# Altium PCB PPS_Buffer.PcbDoc
Units mil, origin at the board's own origin, x right, y up, seen from the top; angles counter-clockwise.
Board outline 655.03 x 750.03 mil, 2 copper layers (Top Layer, Bottom Layer); 24 components, 16 nets, 64 pads, 0 vias.
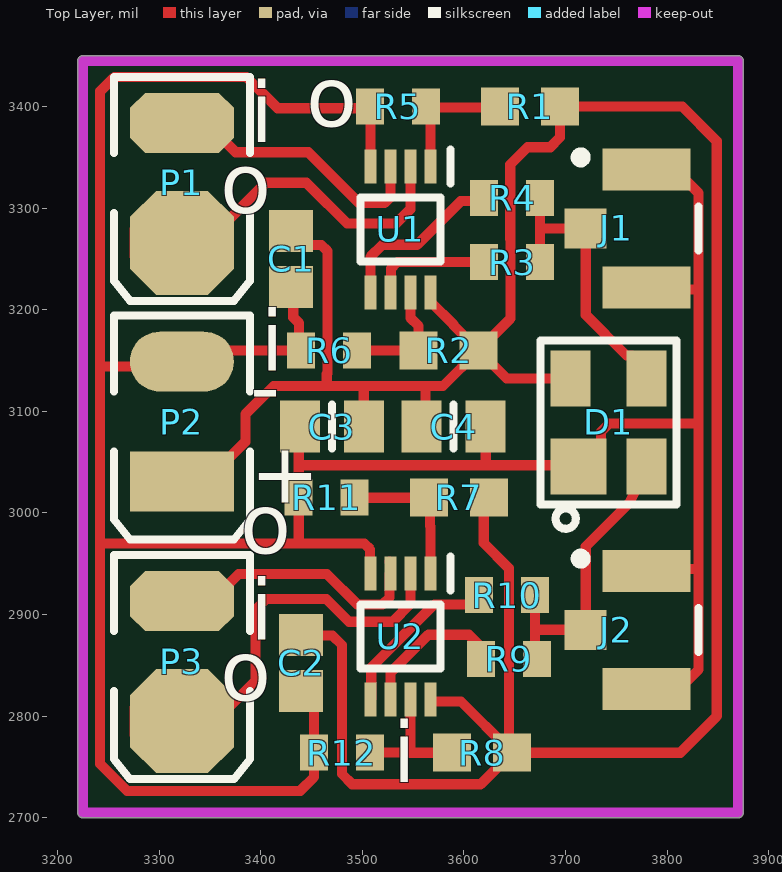
[diagram p0: Top Layer view]
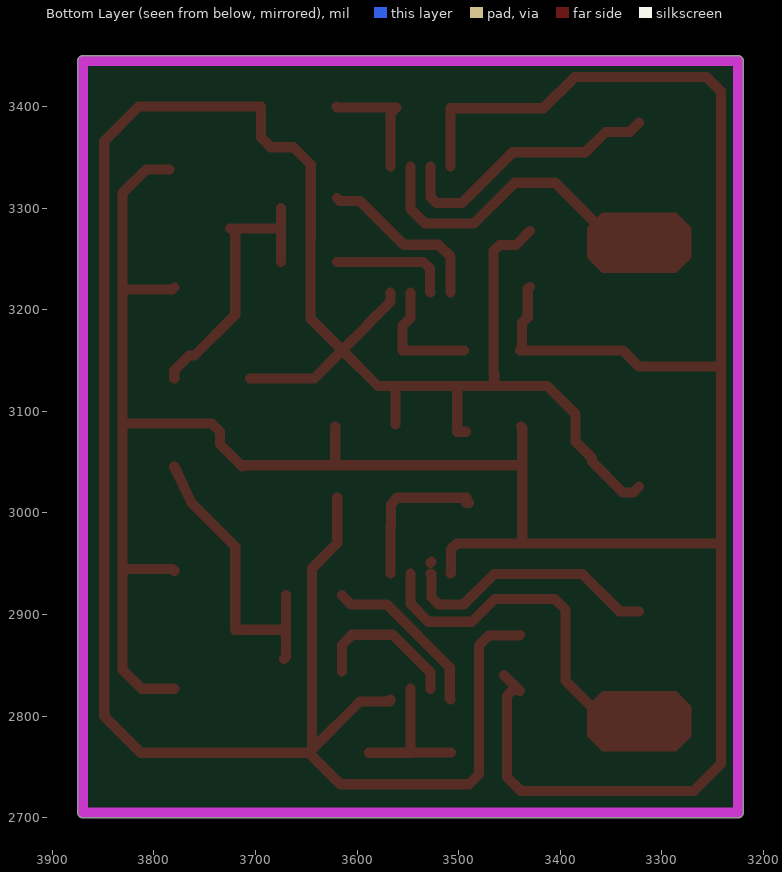
[diagram p1: Bottom Layer view, seen from below]

## Layer stack, top to bottom
Top Solder: solder mask 0.4, Solder Resist, Dk 3.5
Top Layer: signal copper 1.4
Dielectric 1: dielectric 12.6, FR-4, Dk 4.8
Bottom Layer: signal copper 1.4
Bottom Solder: solder mask 0.4, Solder Resist, Dk 3.5

## Board outline
3219.99,2705 ccw(c3225,2705) 3225,2699.99 3870,2699.99 ccw(c3870,2705) 3875.01,2705 3875.01,3445 ccw(c3870,3445) 3870,3450.01 3225,3450.01 ccw(c3225,3445) 3219.99,3445

## Design rules (kind name [scope] priority, off if disabled: settings)
Clearance [All] p1: gap=7 ignorepadtopadclearanceinfootprint=FALSE
PolygonConnect [All] p1: connectstyle=Relief reliefconductorwidth=10 reliefentries=4 polygonreliefangle="90 Angle" airgapwidth=10
RoomDefinition PPS_BUFFER [InComponentClass('PPS_BUFFER')] p1: confinementstyle=ConfineIn formatcopy=TRUE lockcomponents=FALSE outline 3225,2705 3870,2705 3870,3445 3225,3445
RoutingVias [All] p1: holewidth=28 width=50 viastyle="Through Hole" minholewidth=28 minwidth=50 maxholewidth=28 maxwidth=50
SolderMaskExpansion [All] p1: expansion=4 istentingtop=FALSE
Width [All] p1: maxlimit=10 minlimit=10 preferedwidth=10
30 further rules are at their usual default settings.

## Components (designator, comment, footprint, x,y, rotation, side; value= is the part's Value field where it differs from the comment)
C1 "0.1uF" CAPC1608X87X45ML20T05 3430,3250 r270 top
C2 "0.1uF" CAPC1608X87X45ML20T05 3439.92,2852.44 r270 top
C3 "Cap" 6-0805_L 3470,3085 r180 top value=1uF
C4 "Cap" 6-0805_L 3590,3085 r0 top value=10nF
D1 "8240136" SOT143-4L 3742.56,3089.06 r90 top
J1 "1909763-1" TECO-1909763-1_V 3780,3280 r270 top
J2 "1909763-1" TECO-1909763-1_V 3780,2885 r270 top
P1 "Header 2" 3.5X2.8X1.9#1 3322.56,3325 r270 top
P2 "Header 2" 3.5X2.8X1.9#2 3322.56,3090 r270 top
P3 "Header 2" 3.5X2.8X1.9#1 3322.56,2854.05 r270 top
R1 "4.7K" RESC1608X55X30NL15T15 3665,3400 r0 top
R2 "4.7K" RESC1608X55X30NL15T15 3585,3160 r0 top
R3 "49.9R" RESC1608X55X25NL10T15 3647.56,3247 r0 top
R4 "49.9R" RESC1608X55X25NL10T15 3647.44,3310 r0 top
R5 "1k" RESC1608X55X25NL10T15 3535,3400 r0 top
R6 "1k" RESC1608X55X25NL10T15 3467.44,3160 r0 top
R7 "4.7K" RESC1608X55X30NL15T15 3595,3015 r0 top
R8 "4.7K" RESC1608X55X30NL15T15 3618.03,2764.06 r0 top
R9 "49.9R" RESC1608X55X25NL10T15 3644.34,2856.47 r0 top
R10 "49.9R" RESC1608X55X25NL10T15 3642.56,2919.06 r0 top
R11 "1k" RESC1608X55X25NL10T15 3465,3015 r0 top
R12 "1k" RESC1608X55X25NL10T15 3480,2764.06 r0 top
U1 "NC7WV125K8X" SOP50P310X90-8N 3537.56,3279.06 r270 top
U2 "NC7WV125K8X" SOP50P310X90-8N 3537.56,2878.52 r270 top

## Footprints (in the part's own frame and the unit in brackets; to place one, negate y for a bottom-side part, rotate by r counter-clockwise, add the part's x,y. Pads: shape width x height; smd on the part's side, far side on the other; paste and mask are expansions set on the pad)
3.5X2.8X1.9#1 [mm] "SM LED; 2 C-Bend Leads; Body 3.5 x 2.8 x 1.9 mm, inc leads (LxWxH typ)"
  oct 1.5x2.6 smd: 1(-1.5,0)
  oct 2.6x2.6 smd: 2(1.5,0)
  Top Layer region: 1.875,-1.3 2.25,-0.925 2.25,0.925 1.875,1.3 1.125,1.3 0.75,0.925 0.75,-0.925 1.125,-1.3
  silkscreen extent -2.65,-1.7 2.95,1.7
3.5X2.8X1.9#2 [mm] "SM LED; 2 C-Bend Leads; Body 3.5 x 2.8 x 1.9 mm, inc leads (LxWxH typ)"
  oval 1.5x2.6 smd: 1(-1.5,0)
  rect 1.5x2.6 smd: 2(1.5,0)
  silkscreen extent -2.65,-1.7 2.95,1.7
6-0805_L [mm] "Chip Resistor, Body 2.0x1.2mm, IPC High Density"
  rect 1x1.3 smd: 1(-0.8,0) 2(0.8,0)
  silkscreen extent 0,-0.55 0,0.55, body extent -1.07,-0.7 1.07,0.7, height 0.7
CAPC1608X87X45ML20T05 [mm] "Chip Capacitor, 2-Leads, Body 1.60x0.80mm, IPC Low Density"
  rect 1.05x1.1 smd: 1(-0.7,0) 2(0.7,0)
  body extent -0.9,-0.5 0.9,0.5, height 0.87
RESC1608X55X25NL10T15 [mm] "Chip Resistor, 2-Leads, Body 1.70x0.90mm, IPC Medium Density"
  rect 0.7x0.9 smd: 1(-0.7,0) 2(0.7,0)
  body extent -0.85,-0.45 0.85,0.45, height 0.55
RESC1608X55X30NL15T15 [mm] "Chip Resistor, 2-Leads, Body 1.75x0.95mm, IPC Medium Density"
  rect 0.95x0.95 smd: 1(-0.75,0) 2(0.75,0)
  body extent -0.87,-0.48 0.87,0.48, height 0.55
SOP50P310X90-8N [mm]
  rect 0.85x0.3 smd: 1(-1.575,0.75) 2(-1.575,0.25) 3(-1.575,-0.25) 4(-1.575,-0.75) 5(1.575,-0.75) 6(1.575,-0.25) 7(1.575,0.25) 8(1.575,0.75)
  silkscreen extent -2,-1 0.8,1.25, body extent -1.55,-1 1.55,1, height 0.9
SOT143-4L [mm] "SOT143-4L, 4-Leads, Body 2.95x2.4mm, Pitch 1.70/1.90mm"
  rect 1.4x1.4 smd: 1(-1.1,0.75)
  rect 1.4x1 smd: 2(-1.1,-0.95) 3(1.1,-0.95) 4(1.1,0.95)
  silkscreen extent -2.66,-1.7 2.05,1.7, body extent -1.2,-1.46 1.2,1.46, height 1.03
TECO-1909763-1_V [mm] "SMD, 3-Leads, Body 2.6x2.6mm, Height 1.25mm"
  rect 1.05x2.2 smd: 1(-1.475,0) 3(1.475,0)
  rect 1x1.05 smd: 2(0,-1.525)
  silkscreen extent -1.9,-1.77 0.55,1.3, body extent -1.5,-1.55 1.5,1.55, height 1.23

## Part data
C1 C2: library part CMP-2006-00003-1, "C0603X104K5RACAUTO", Manufacturer=Kemet, Part Number=C0603X104K5RACAUTO
C3 C4: "Capacitor", LatestRevisionDate=17-Jul-2002, LatestRevisionNote="Re-released for DXP Platform.", PackageDescription="Radial Cap, Thru-Hole; 2 Leads; 0.3 in Pin Spacing", PackageReference=RAD-0.3, Published=8-Jun-2000, Publisher="Altium Limited"
D1: library part CMP-1486-00002-1, "TVS Diode WE-TVS-HS, VRWM=3.3V", Manufacturer="Wuerth Elektronik", Reverse Stand Off Voltage=3.3V, ComponentLink1Description="Manufacturer URL", ComponentLink1URL=http://www.we-online.com, ComponentLink2Description=Datasheet, ComponentLink2URL=http://katalog.we-online.de/kataloge/eisos/media/pdf/8240136.pdf, PackageReference=SOT143-4L, PartNumber=8240136
J1 J2: library part CMP-2000-07505-1, "Ultra Miniature Coaxial Connector Jack, 60 V, 50 Ohm, -40 to 90 degC, RoHS, Tape and Reel", Case\/Package=SMD/SMT, Dielectric Material=Polymer, Housing Colour=Beige, Manufacturer="TE Connectivity", Max Frequency=6GHz, Max Operating Temperature=90degC, Min Operating Temperature=-40degC, Package Description="3-Pin Surface Mount Device, Body 2.6 x 2.6 mm", Package Quantity=1, Package Reference=TECO-1909763-1, Body Material=LiquidCrystalPolymer, Body Plating=Gold, Connector Type=Jack, Contact Material=CopperAlloy, Contact Plating=Gold, Datasheet URL=http://www.te.com/commerce/DocumentDelivery/DDEController?Action=srchrtrv&DocNm=1909763&DocType=Customer+Drawing&DocLang=English, Datasheet Version="Rev. B2, 11/2015", ELV=Compliant, Fastening Type=Pull, Gender=Female, Impedance=50Ohm, Insulation Material=Thermoplastic, Lead Free=LeadFree, Length=3mm, Manufacturer URL=http://www.te.com/, Mount=SurfaceMount, Mounting Technology=SurfaceMount, Orientation=Straight, Packaging=TapeandReel, PCB Mounting Orientation=Vertical, Radiation Hardening=No, RoHSCompliant=true, Termination=SMD/SMT
P1 P2 P3: "Header, 2-Pin", LatestRevisionDate=17-Jul-2002, LatestRevisionNote="Re-released for DXP Platform.", Publisher="Altium Limited"
R1 R2 R7 R8: library part CMP-1012-00586-3, "Precision Thick Film Chip Resistor, 4.7 KOhm, +/- 1%, -55 to 155 degC, 0603 (1608 Metric), RoHS, Tape and Reel ERJ-3EKF4701V", Case Code (Imperial)=1206, Case Code (Metric)=3216, Case\Package=1205, Max Operating Temperature="125 degC", Min Operating Temperature="-55 degC", Package Quantity=1, Power Rating="250 mW", Resistance="220 Ohm", Tolerance=5%, Type (Resistor)="Thick Film", Voltage Rating="50 V", ComponentLink1Description="Manufacturer URL", ComponentLink1URL=http://www.panasonic.com/, ComponentLink2Description=Datasheet, ComponentLink2URL=http://industrial.panasonic.com/cdbs/www-data/pdf/RDA0000/AOA0000C86.pdf, DatasheetVersion=Apr-15, Elements=4, Height="0.024 inch", Length="0.126 inch", Mount="Surface Mount", PackageDescription="2-Pin Surface Mount Device, Body 1.6 x 0.85 mm", PackageReference=0603, Packaging="Tape and Reel", Pins=8, Radiation Hardening=No, REACH SVHC="No SVHC", RoHSCompliant=true, Width="0.063 inch"
R3 R4 R5 R6 R9 R10 R11 R12: library part CMP-1659-00036-1, "General Purpose Chip Resistor, 49.9 Ohm, +/- 1%, -55 to 155 degC, 0603 (1608 Metric), RoHS, Tape and Reel", Case\Package=LQFP, Max Operating Temperature="85 degC", Max Supply Voltage="3.63 V", Min Operating Temperature="-40 degC", Min Supply Voltage="2.97 V", Package Quantity=250, ComponentLink1Description="Manufacturer URL", ComponentLink1URL=http://www.yageo.com/, ComponentLink2Description=Datasheet, ComponentLink2URL=https://datasheet.ciiva.com/11808/0900766b80f96399-11808223.pdf, DatasheetVersion="Rev. 4, 04/2009", Interface=SPI, PackageDescription="2-Pin Surface Mount Device, Body 1.6 x 0.8 mm", PackageReference=0603, Packaging=Tray, Pins=48, RoHSCompliant=true
U1 U2: "Integrated Circuit", Manufacturer_Name="ON Semiconductor", Mouser Part Number=512-NC7WV125K8X, Arrow Part Number=NC7WV125K8X, Arrow Price/Stock=https://www.arrow.com/en/products/nc7wv125k8x/on-semiconductor, Datasheet Link=https://www.mouser.com/datasheet/2/308/NC7WV125-1301459.pdf, Height=0.9mm, Manufacturer_Part_Number=NC7WV125K8X, Mouser Price/Stock=https://www.mouser.com/Search/Refine.aspx?Keyword=512-NC7WV125K8X
  U1: Supplier 1=Newark

## Nets (pads, with @x,y where several pads share a name; then routed paths per layer and width w, separated by ;. In a path a pad name is that pad's centre, name@x,y a point inside that pad or via, vN(x,y) a via of type N, cw(c..) or ccw(c..) an arc to the next point about the centre after c; other vN are vias at no path point)
+3.3V: C1.1 C2.1 C3.1 C4.1 D1.4 P2.2 R1.2 R2.2 R7.2 R8.2 U1.8 U2.8 | length 2766.7
  Top Layer w10: P2.2@3322.56,3025.94 3328.5,3020 3338.27,3020 3368.74,3050.47 3368.74,3053.74 3385,3070 3385,3097.25 3412.75,3125 3465,3125 ; C1.1 3443.73,3263.83 3459.8,3263.83 3465.66,3257.97 3465.66,3137.31 3465,3136.65 3465,3125 ; C2.1 3440.64,2879.28 3470.72,2879.28 3480,2870 3480,2743 3490,2733 3616.5,2733 R8.2 ; C3.1@3492.99,3080 C3.1@3501.5,3080 ; C3.1 3501.5,3123.5 3500,3125 ; C4.1@3562.34,3087.34 3562.34,3125 ; U2.8 3567.99,2815.61 3567.99,2814.48 3597.14,2814.48 R8.2@3644.34,2767.28 ; U1.8 3567.09,3208.06 3590,3185.14 3590,3184.53 R2.2 ; R7.2@3619.53,3015 3619.53,2970.47 3644.34,2945.66 R8.2@3644.34,2767.28 ; D1.4 3642.17,3132.36 R2.2 ; 3465,3125 3500,3125 ; 3500,3125 3562.34,3125 ; 3562.34,3125 3579.53,3125 R2.2 ; R2.2 3645.78,3191.25 3645.78,3269.69 3645.66,3269.81 3645.66,3342.99 3662.67,3360 3685,3360 3694.53,3369.53 R1.2 3815,3400 3849,3366 3849,2800 3813.06,2764.06 R8.2 ; R8.2@3644.34,2767.28 R8.2
ANT1_IN: P1.1 U1.3 | length 270.5
  Top Layer w10: P1.1 3331.62,3375 3355.46,3375 3375.46,3355 3447,3355 3497,3305 3521.86,3305 3527.72,3310.86 U1.3
ANT1_OUT: P1.2 U1.2 | length 313.7
  Top Layer w10: P1.2 3345.94,3265.94 3405,3325 3445,3325 3447.93,3322.07 3485,3285 3533.4,3285 3547.4,3299 U1.2
ANT2_IN: P3.1 U2.3 | length 260.2
  Top Layer w10: P3.1@3322.56,2903.11 3341.51,2903.11 3378.4,2940 3465,2940 3495,2910 3520,2910 3526.81,2916.81 3526.81,2939.63 U2.3 ; U2.3@3526.81,2951.97 U2.3@3527.72,2951.06
ANT2_OUT: P3.2 U2.2 | length 366.3
  Top Layer w10: P3.2@3322.56,2785 3337.56,2800 3360,2800 3395,2835 3395,2905 3405.23,2915.23 3464.77,2915.23 3487,2893 3529.92,2893 3547.4,2910.49 U2.2
GND: C1.2 C2.2 C3.2 C4.2 D1.1 J1.1 J1.3 J2.1 J2.3 P2.1 R5.1 R6.1 R11.1 R12.1 U1.4 U2.4 | length 3166.5
  Top Layer w10: C1.2 3432.12,3220.32 3432.12,3192.63 3437.89,3186.86 3437.89,3161.99 R6.1 3338.5,3160 3322.56,3144.06 3242,3144.06 ; C3.2 3437.44,3083.94 3437.44,3046.95 ; C2.2 C2.2@3455.59,2840.55 ; C2.2@3445,2827.44 3452.44,2820 R12.1 3452.44,2740 3438.91,2726.47 3268.53,2726.47 3242,2753 3242,2970 ; U2.4 3507.79,2940.77 3507.79,2964.14 3501.93,2970 3440,2970 ; U1.4 3508.03,3398.3 3416.7,3398.3 3386,3429 3256,3429 3242,3415 3242,3144.06 ; C4.2 3621.5,3048.45 3620,3046.95 ; J2.3 3812,2826.93 3831.07,2846 3831.07,2945 ; J2.1 3781.93,2945 3831.07,2945 ; J1.3 3781.93,3220 3831.07,3220 ; J1.1@3785,3338.07 3807.64,3338.07 3831.07,3314.64 3831.07,3220 ; 3830,3088 3743,3088 3735.06,3080.06 3735.06,3067.77 D1.1 3711.83,3046.95 3620,3046.95 ; 3242,2970 3440,2970 ; 3242,2970 3242,3144.06 ; 3437.44,3046.95 3620,3046.95 ; 3437.44,3046.95 R11.1 3437.44,2972.56 3440,2970 ; 3831.07,2945 3831.07,3088 3831.07,3220
NetD1_2: D1.2 J2.2 R9.2 R10.2 | length 295.6
  Top Layer w10: R10.2 3670.12,2885 ; R9.2 3670.1,2858.27 3670.1,2885 ; D1.2 3763.04,3010 3719.96,2966.92 J2.2 3670.12,2885
NetD1_3: D1.3 J1.2 R3.2 R4.2 | length 278.4
  Top Layer w10: R3.2 3675.12,3280 ; R4.2@3675.12,3300 3675.12,3280 ; J1.2 3719.96,3195.04 3760.08,3154.92 3765.27,3154.92 3779.96,3140.24 D1.3 ; J1.2@3724.96,3280 3675.12,3280
NetR1_1: R1.1 R5.2 U1.1 | length 120.1
  Top Layer w10: U1.1 3567.09,3393.2 3561.23,3399.06 3619.53,3399.06 R1.1@3620.47,3400
NetR2_1: R2.1 R6.2 U1.7 | length 120.9
  Top Layer w10: R6.2 R2.1 3555.47,3184 3547.4,3192.07 U1.7
NetR3_1: R3.1 U1.6 | length 118.1
  Top Layer w10: U1.6 3528.17,3217.5 3528.17,3240.45 3534.72,3247 R3.1
NetR4_1: R4.1 U1.5 | length 170.8
  Top Layer w10: U1.5 3508.03,3252.03 3520,3264 3554,3264 3596.96,3306.96 3616.84,3306.96 R4.1
NetR7_1: R7.1 R11.2 U2.1 | length 147.7
  Top Layer w10: R11.2@3490,3010 R11.2@3492.56,3010 ; R11.2 3560.47,3015 3566.76,3008.71 3566.76,2987.16 3567.09,2986.83 U2.1
NetR8_1: R8.1 R12.2 U2.7 | length 143.9
  Top Layer w10: R12.2 3547.4,2764.09 ; U2.7@3547.4,2827.05 3547.4,2764.06 R8.1
NetR9_1: R9.1 U2.6 | length 148.6
  Top Layer w10: U2.6@3527.72,2827.05 3527.72,2842.72 3565.1,2880.1 3604.9,2880.1 3615,2870 R9.1@3615,2844.06
NetR10_1: R10.1 U2.5 | length 167.5
  Top Layer w10: U2.5 3508.94,2817.42 3508.94,2847.98 3570.96,2910 3606.22,2910 3615,2918.78 R10.1

## Keep-outs
Keep-Out Layer:
  lines w10: 3225,2705 3225,3445 3870,3445 3870,2705 3225,2705

## Silkscreen, mask and mechanical layers (free items; w line width, h text height)
Top Overlay:
  text "o" at 3445,3380 h60
  text "i" at 3390,3365 h60
  text "o" at 2680,3350 h60
  text "o" at 2675,3340 h60
  text "o" at 3360,3295 h60
  text "i" at 3400,3140 h60
  text "-" at 3390,3095.01 h60
  text "+" at 3390,3010 h60
  text "o" at 3380,2960 h60
  text "i" at 3390,2875 h60
  text "o" at 3360,2815 h60
  text "i" at 3530,2735 h60